# EAGLE board Marcello Acrylic (EAGLE 9.2.2)
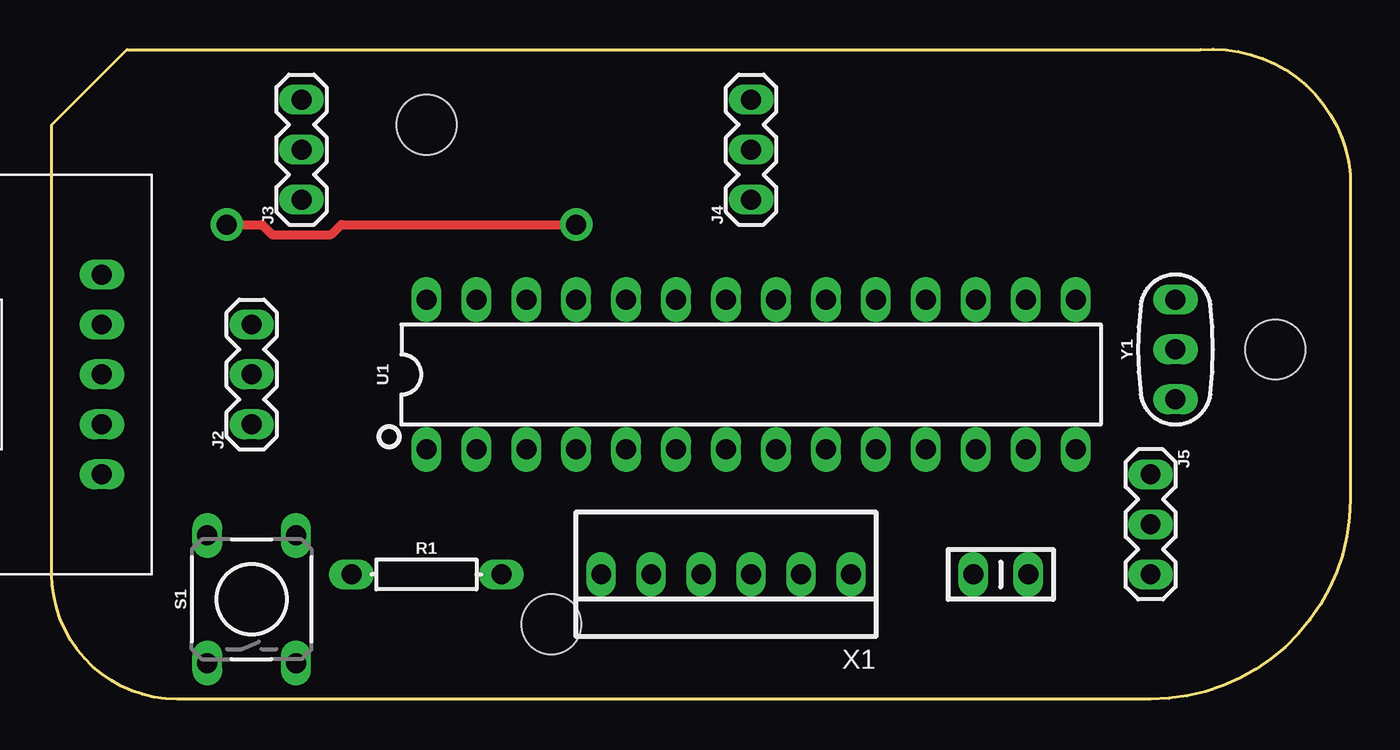
[diagram p0: board, top side]
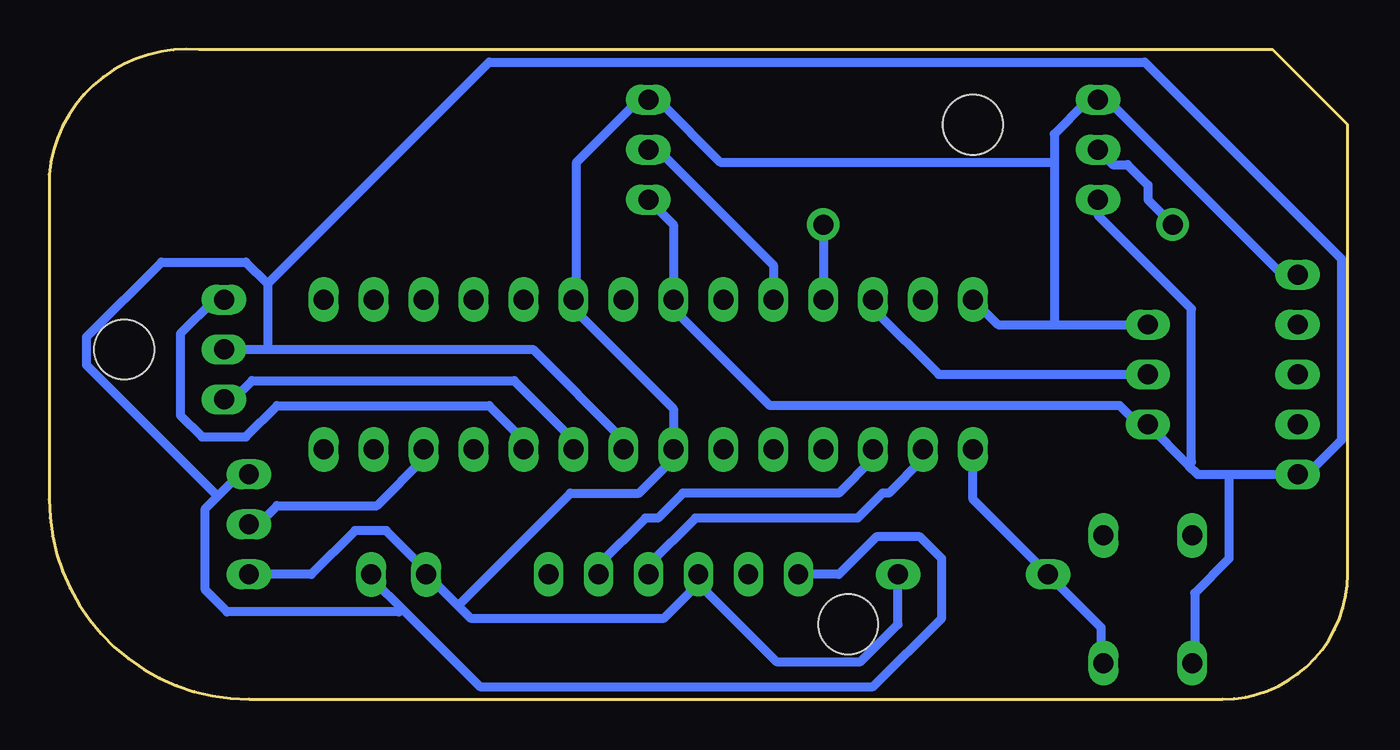
[diagram p1: board, bottom side, seen from below]

Size 66.04 x 33.05 mm. Coordinates in mm from the lower left corner, seen from the top.
Outline: 0,6.35 0,29.21 3.81,33.02 58.42,33.02 arc-90 66.04,26.67 66.04,10.16 arc-90 55.88,0 6.35,0 arc-90 0,6.35
Copper layers (1*16): Top 0.035mm / dielectric 1.5mm / Bottom 0.035mm
Design rules "OthermillDRC_1_32_v2_force18": minimum track width 18mil, minimum drill 0.8mm, track to track 0.794003125mm, track to pad 0.794003125mm, pad to pad 0.794003125mm, via to via 0.794003125mm, smd to smd 0mil, copper to edge 0mil, drill to drill 1mil, minimum pad ring 10mil, minimum via ring 10mil, stop-mask expansion 1mil, vias tented up to drill 30mil, thermal gap 10mil
Net classes: 0 default: width 0.457 mm, drill 0.457 mm, clearance 0.457 mm
Holes 3.05 mm at 25.4,3.81 62.23,17.78 19.05,29.21

## Footprints (pad centres in the part's own frame; a part is rotated, then mirrored left to right if it is on the bottom)
CAP-PTH-SMALL-KIT = drill 1.016 long: 1 -1.397,0; 2 1.397,0
1X03 = drill 1.016 long: 1 0,0; 2 2.54,0; 3 5.08,0
AXIAL-0.3 = drill 1.016 long: P$1 -3.81,0; P$2 3.81,0
TACTILE_SWITCH_PTH_6.0MM = drill 1.016 long: 1 -3.251,2.261; 2 3.251,2.261; 3 -3.251,-2.261; 4 3.251,-2.261
DIP28 = drill 1.016 long: 1 -16.51,-3.81; 2 -13.97,-3.81; 3 -11.43,-3.81; 4 -8.89,-3.81; 5 -6.35,-3.81; 6 -3.81,-3.81; 7 -1.27,-3.81; 8 1.27,-3.81; 9 3.81,-3.81; 10 6.35,-3.81; 11 8.89,-3.81; 12 11.43,-3.81; 13 13.97,-3.81; 14 16.51,-3.81; 15 16.51,3.81; 16 13.97,3.81; 17 11.43,3.81; 18 8.89,3.81; 19 6.35,3.81; 20 3.81,3.81; 21 1.27,3.81; 22 -1.27,3.81; 23 -3.81,3.81; 24 -6.35,3.81; 25 -8.89,3.81; 26 -11.43,3.81; 27 -13.97,3.81; 28 -16.51,3.81
USBCONNECTOR = drill 1.016 long: P$1 -8.89,-1.27; P$2 -6.35,-1.27; P$3 -3.81,-1.27; P$4 -1.27,-1.27; P$5 1.27,-1.27
22-23-2061 = drill 1 long: 1 -6.35,0; 2 -3.81,0; 3 -1.27,0; 4 1.27,0; 5 3.81,0; 6 6.35,0
RESONATOR-PTH-7.6X3.8 = drill 1.016 long: 1 -2.54,0; 2 0,0; 3 2.54,0

## Placement (x,y rotation side)
C1  0.1uF  [CAP-PTH-SMALL-KIT]  48.26,6.35 0 top
J2  455-1750-1-ND  [1X03]  10.16,13.97 90 top
J3  455-1750-1-ND  [1X03]  12.7,25.4 90 top
J4  455-1750-1-ND  [1X03]  35.56,25.4 90 top
J5  455-1750-1-ND  [1X03]  55.88,11.43 270 top
R1  10k  [AXIAL-0.3]  19.05,6.35 0 top
S1  MOMENTARY-SWITCH-SPST-PTH-6.0MM  [TACTILE_SWITCH_PTH_6.0MM]  10.16,5.08 90 top
U1  328P  [DIP28]  35.56,16.51 0 top
U$1  USB  [USBCONNECTOR]  1.27,20.32 90 top
X1  [22-23-2061]  34.29,6.35 180 top
Y1  [RESONATOR-PTH-7.6X3.8]  57.15,17.78 90 top

## Library data of the parts
C1 = ML; PROD_ID: CAP-08370
J2-J5 = ML; PROD_ID: XXX-00000
R1 = ML; PROD_ID: RES-12183
S1 = ML; PROD_ID: SWCH-08441; SF_SKU: COM-00097
U1 = ML; PROD_ID: IC-09136
U$1 Y1 = ML
X1 = con-molex; MF: MOLEX; MPN: 22-23-2061; OC_FARNELL: 1462922; OC_NEWARK: 27C1933

## Nets
5V: C1.1 J2.3 J3.3 J4.3 J5.3 R1.P$2 U1.7 U1.20 U1.28 U$1.P$5 X1.4
GND: C1.2 J2.1 J3.1 J4.1 J5.1 S1.1 U1.8 U1.22 U$1.P$1 X1.6 Y1.2
N$1: J4.2 U1.24
N$2: J2.2 U1.26
N$3: J3.2 U1.25
N$4: U1.10 Y1.3
N$5: U1.9 Y1.1
N$6: U1.3 X1.2
N$7: R1.P$1 S1.3 U1.1
N$8: U1.2 X1.3
N$11: J5.2 U1.12

## Tracks (layer width: path | path; a pad name or v marks a point on that pad's centre or on a via)
5V
  Bottom 0.457: 14.92,19.05 17.78,19.05 U1.28 | 14.92,19.05 J2.3 | U$1.P$5 3.33,21.59 12.22,30.48 J3.3 12.86,30.32 13.34,30.32 14.92,28.73 14.92,27.3 | 14.92,27.3 14.92,19.05 | 45.24,4.76 46.83,6.35 C1.1 46.83,6.51 48.9,8.57 50.48,8.57 52.7,6.35 J5.3 | 45.24,4.76 44.61,4.13 34.77,4.13 33.02,5.87 X1.4 32.86,5.71 29.05,1.91 24.77,1.91 22.86,3.81 R1.P$2 | 45.24,4.76 39.53,10.48 36.04,10.48 34.45,12.06 34.45,12.54 U1.7 34.29,14.76 39.37,19.84 U1.20 39.21,20.48 39.21,27.3 36.04,30.48 J4.3 35.4,30.32 34.93,30.32 31.91,27.3 14.92,27.3
GND
  Bottom 0.457: J4.1 34.29,24.13 U1.22 34.13,20.16 34.13,19.69 29.37,14.92 11.59,14.92 10.8,14.13 10.32,14.13 J2.1 8.1,11.91 | 6.03,11.43 7.62,11.43 8.1,11.91 | 6.03,11.43 U$1.P$1 2.38,11.59 1.91,11.59 0.32,13.18 0.32,22.38 10.32,32.38 43.66,32.38 54.93,21.11 | 6.03,11.43 6.03,7.14 7.78,5.4 7.78,1.91 S1.1 | J3.1 12.7,24.61 7.94,19.84 7.94,12.06 8.1,11.91 | U1.8 36.83,13.18 41.43,17.78 54.93,17.78 | Y1.2 54.93,17.78 | X1.6 25.88,6.35 23.97,8.26 21.75,8.26 20.64,7.14 20.64,4.13 24.13,0.64 44.13,0.64 48.1,4.6 | 48.1,4.6 49.53,6.03 49.53,6.35 C1.2 | J5.1 56.36,11.43 57.47,10.32 | 57.47,10.32 58.1,9.68 58.1,5.56 56.99,4.45 48.26,4.45 48.1,4.6 | 54.93,21.11 54.93,17.78 | 54.93,21.11 56.04,22.23 60.33,22.23 64.14,18.41 64.14,16.99 57.47,10.32
N$1
  Bottom 0.457: U1.24 29.21,22.07 35.08,27.94 J4.2
N$2
  Bottom 0.457: J2.2 20.8,16.51 24.13,19.84 U1.26
N$3  (via drill 1.02 pad 1.65)
  Top 0.457: v8.89,24.13 10.68,24.13 11.2,23.62 14.2,23.62 14.72,24.13 v26.67,24.13
  Bottom 0.457: J3.2 11.95,27.18 11.2,27.18 10.15,26.14 10.15,25.39 v8.89,24.13 | v26.67,24.13 U1.25
N$4
  Bottom 0.457: U1.10 41.91,13.18 43.66,14.92 54.45,14.92 56.04,13.33 58.26,13.33 59.37,14.45 59.37,18.57 57.63,20.32 Y1.3
N$5
  Bottom 0.457: U1.9 39.37,13.18 42.39,16.19 55.72,16.19 56.67,15.24 Y1.1
N$6
  Bottom 0.457: X1.2 38.1,6.83 35.72,9.21 35.08,9.21 33.81,10.48 25.88,10.48 24.13,12.22 U1.3
N$7
  Bottom 0.457: S1.3 12.54,1.91 12.54,3.65 R1.P$1 19.05,10.16 U1.1
N$8
  Bottom 0.457: X1.3 35.56,6.83 33.18,9.21 24.92,9.21 23.65,10.48 23.34,10.48 21.59,12.22 U1.2
N$11
  Bottom 0.457: U1.12 46.99,12.22 49.37,9.84 54.45,9.84 55.4,8.89 J5.2